# Altium PCB PCB_3U_RJ45.PCBDOC (part 2 of 2)
Units mil, origin at the board's own origin, x right, y up, seen from the top; angles counter-clockwise.
Board outline 2496.06 x 3937 mil, 4 copper layers (TopLayer, MidLayer2, Internal Plane 1, BottomLayer), stack 44.239 mil thick; 189 components, 140 nets, 780 pads, 257 vias.
Unrouted connection lines stored in the file: 406.
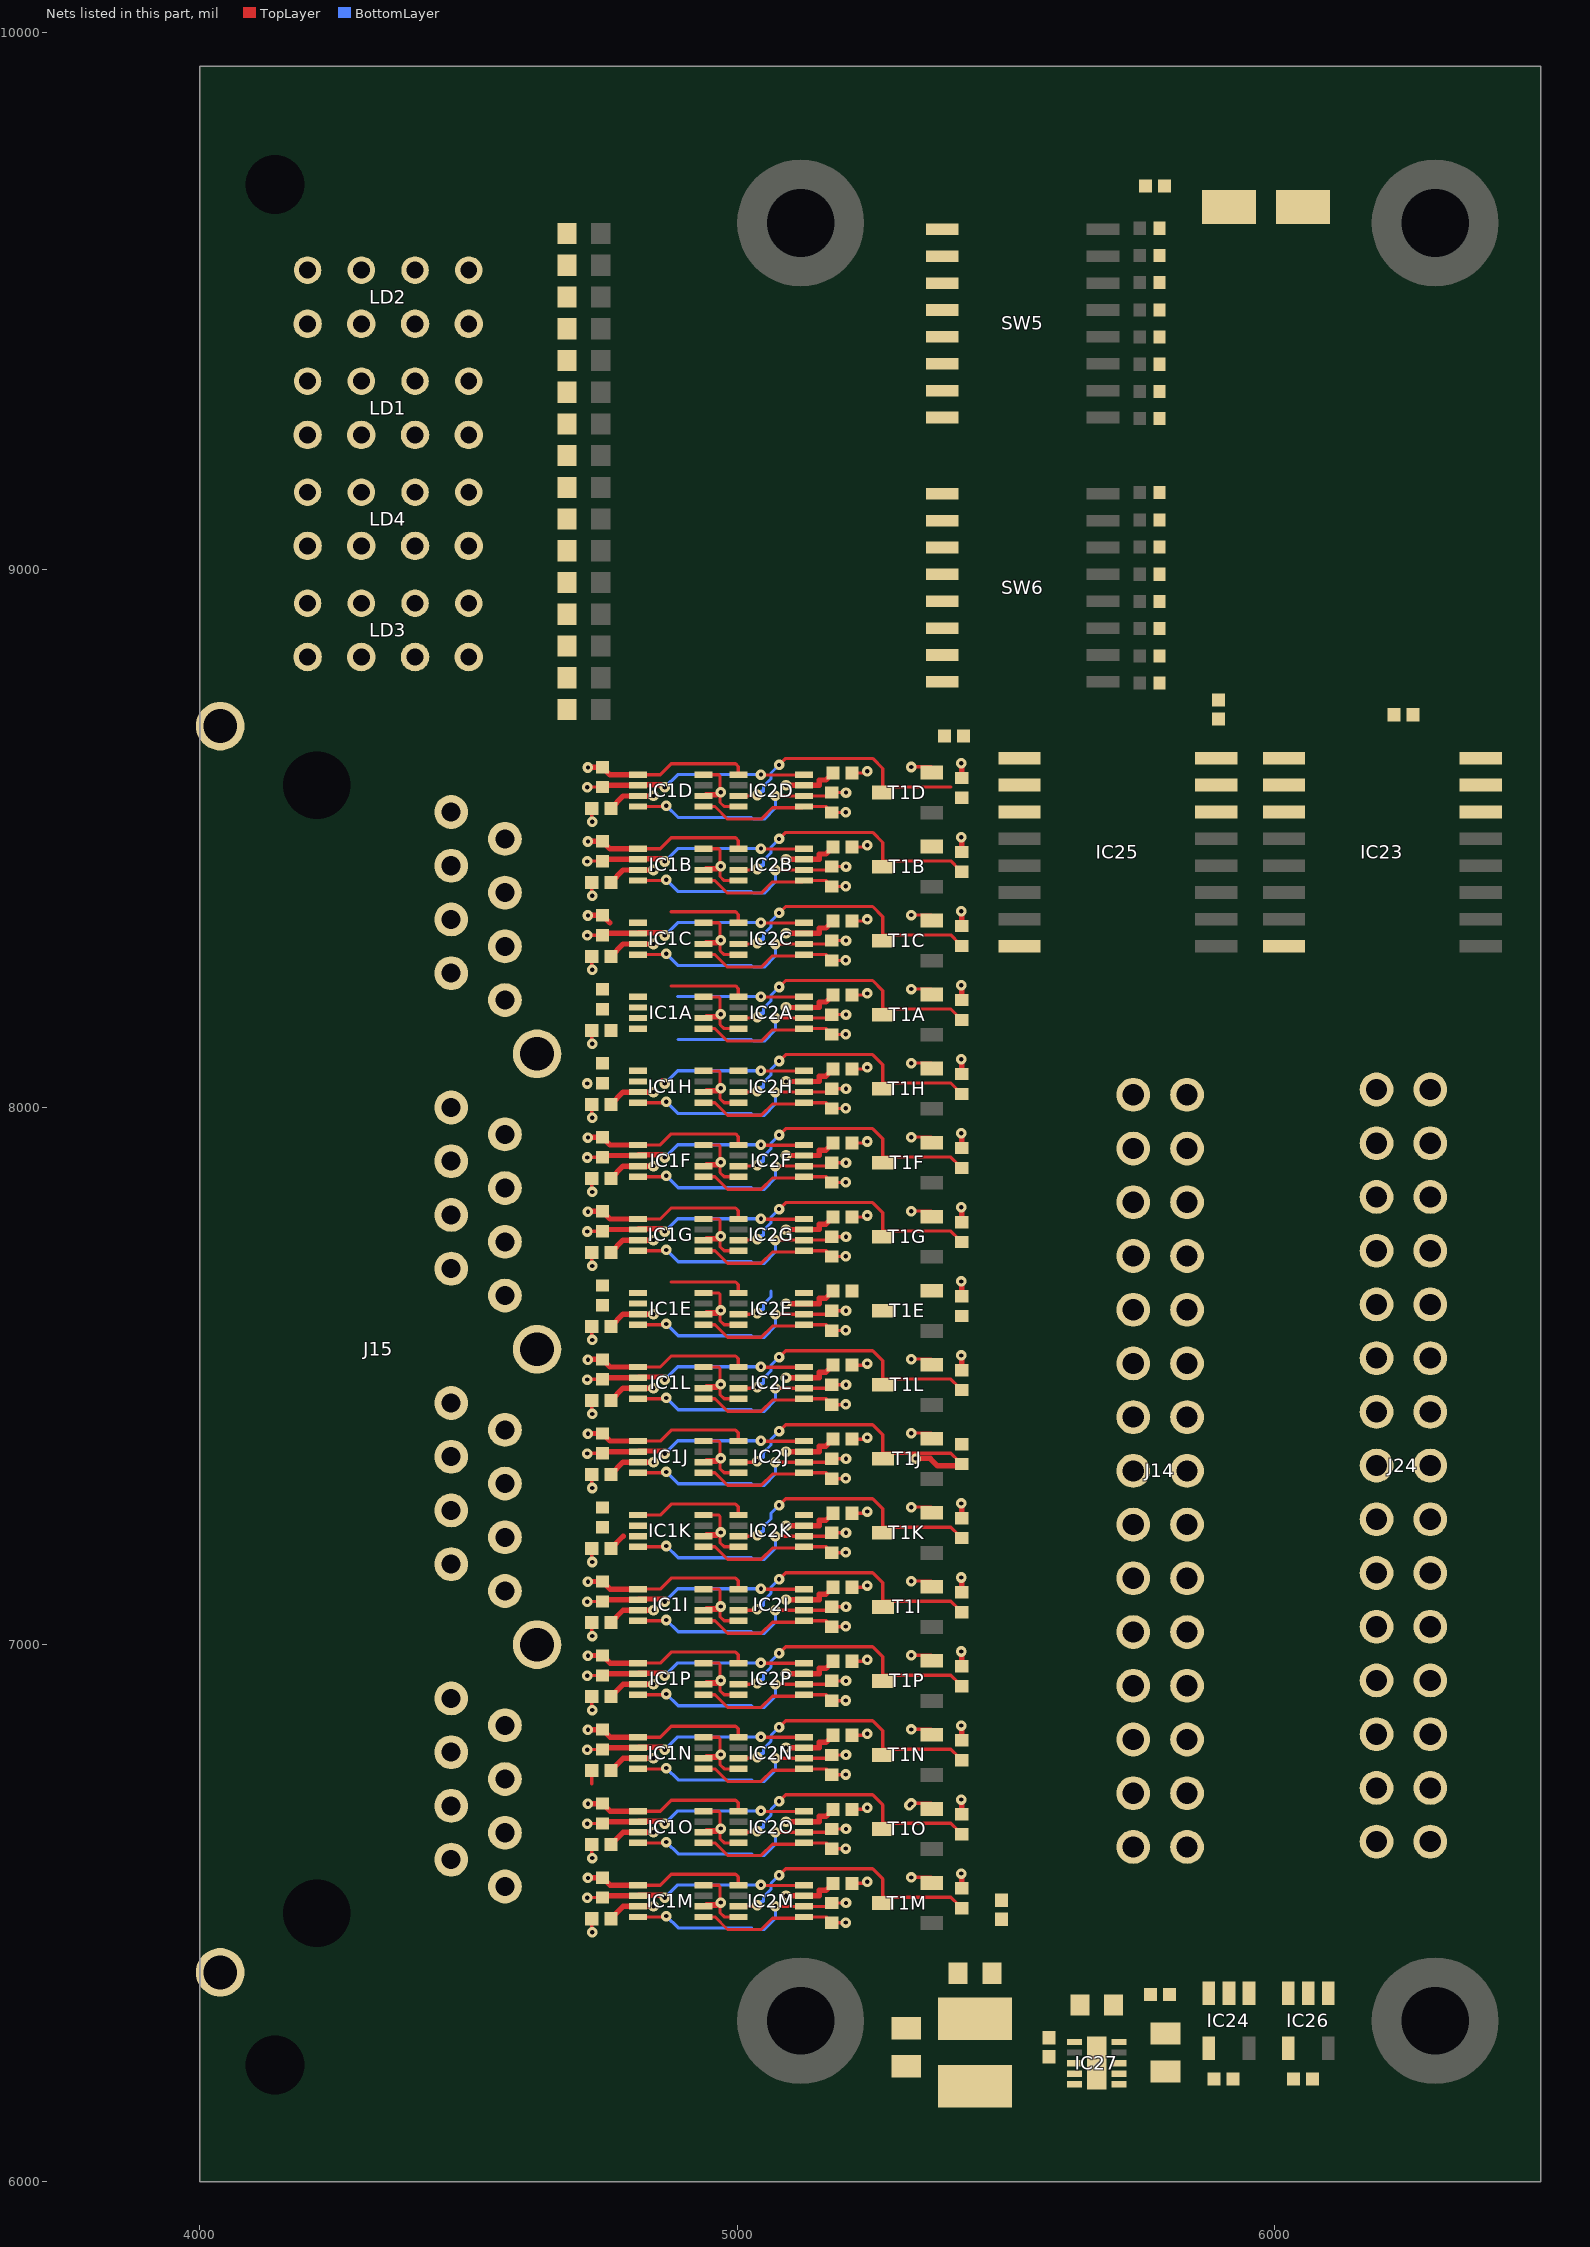
[diagram p3: the nets of this part, all layers, seen from the top]

## Via types
v1: diameter 19.68, hole 7.87, TopLayer to BottomLayer, 257 vias

## Nets (pads, with @x,y where several pads share a name; then routed paths per layer and width w, separated by ;. In a path a pad name is that pad's centre, name@x,y a point inside that pad or via, vN(x,y) a via of type N, cw(c..) or ccw(c..) an arc to the next point about the centre after c; other vN are vias at no path point) (continued)
GND: C1A.1 C1B.1 C1C.1 C1D.1 C1E.1 C1F.1 C1G.1 C1H.1 C1I.1 C1J.1 C1K.1 C1L.1 C1M.1 C1N.1 C1O.1 C1P.1 C2A.1 C2B.1 C2C.1 C2D.1 C2E.1 C2F.1 C2G.1 C2H.1 C2I.1 C2J.1 C2K.1 C2L.1 C2M.1 C2N.1 C2O.1 C2P.1 C57.1 C58.1 C59.1 C60.1 C61.1 C62.2 C63.1 C64.1 C65.1 C66.1 C67.1 C68.1 IC1A.2 IC1A.4 IC1B.2 IC1B.4 IC1C.2 IC1C.4 IC1D.2 IC1D.4 IC1E.2 IC1E.4 IC1F.2 IC1F.4 IC1G.2 IC1G.4 IC1H.2 IC1H.4 IC1I.2 IC1I.4 IC1J.2 IC1J.4 IC1K.2 IC1K.4 IC1L.2 IC1L.4 IC1M.2 IC1M.4 IC1N.2 IC1N.4 IC1O.2 IC1O.4 IC1P.2 IC1P.4 IC2A.4 IC2B.4 IC2C.4 IC2D.4 IC2E.4 IC2F.4 IC2G.4 IC2H.4 IC2I.4 IC2J.4 IC2K.4 IC2L.4 IC2M.4 IC2N.4 IC2O.4 IC2P.4 IC23.1 IC23.8 IC24.2 IC25.1 IC25.8 IC26.2 IC27.1 IC27.6 IC27.11 J14.1 J14.4 J14.7 J14.10 J14.13 J14.16 J14.19 J14.22 J14.25 J15.SH J24.1 J24.4 J24.7 J24.10 J24.13 J24.16 J24.19 J24.22 J24.25 R122.1 SW5.9 SW5.10 SW5.11 SW5.12 SW5.13 SW5.14 SW5.15 SW5.16 SW6.9 SW6.10 SW6.11 SW6.12 SW6.13 SW6.14 SW6.15 SW6.16 T1A.2 T1B.2 T1C.2 T1D.2 T1E.2 T1F.2 T1G.2 T1H.2 T1I.2 T1J.2 T1K.2 T1L.2 T1M.2 T1N.2 T1O.2 T1P.2 | length 4300.4
  TopLayer w6: C2M.1@4729.41,6489.2 4729.41,6464.91 v1(4730.13,6464.2) ; C2O.1@4729.41,6626.99 4729.41,6602.71 v1(4730.13,6601.99) ; 4729.41,6740.5 C2N.1@4729.41,6764.79 ; C2P.1@4729.41,6902.58 4729.41,6878.3 v1(4730.13,6877.58) ; C2I.1@4729.41,7040.38 4729.41,7016.09 v1(4730.13,7015.38) ; C2K.1@4729.41,7178.17 4729.41,7153.89 v1(4730.13,7153.17) ; C2J.1@4729.41,7315.97 4729.41,7291.69 v1(4730.13,7290.97) ; C2L.1@4729.41,7453.76 4729.41,7429.48 v1(4730.13,7428.76) ; C2E.1@4729.41,7591.56 4729.41,7567.28 v1(4730.13,7566.56) ; C2G.1@4729.41,7729.35 4729.41,7705.07 v1(4730.13,7704.35) ; C2F.1@4729.41,7867.15 4729.41,7842.87 v1(4730.13,7842.15) ; C2H.1@4729.41,8004.94 4729.41,7980.66 v1(4730.13,7979.94) ; C2A.1@4729.41,8142.74 4729.41,8118.46 v1(4730.13,8117.74) ; C2C.1@4729.41,8280.54 4729.41,8256.25 v1(4730.13,8255.54) ; C2B.1@4729.41,8418.33 4729.41,8394.05 v1(4730.13,8393.33) ; C2D.1@4729.41,8556.13 4729.41,8531.84 v1(4730.13,8531.13) ; IC1M.4@4937.15,6551.57 4965.6,6551.57 4968.13,6549.04 4968.13,6520.62 v1(4969.53,6519.22) v1@4968.13,6517.82 ; IC1O.4@4937.15,6689.36 4965.6,6689.36 4968.13,6686.83 4968.13,6658.41 v1(4969.53,6657.01) v1@4968.13,6655.61 ; IC1N.4@4937.15,6827.16 4965.6,6827.16 4968.13,6824.63 4968.13,6796.21 v1(4969.53,6794.81) v1@4968.13,6793.41 ; IC1P.4@4937.15,6964.95 4965.6,6964.95 4968.13,6962.43 4968.13,6934.01 v1(4969.53,6932.6) v1@4968.13,6931.2 ; IC1I.4@4937.15,7102.75 4965.6,7102.75 4968.13,7100.22 4968.13,7071.8 v1(4969.53,7070.4) v1@4968.13,7069 ; IC1K.4@4937.15,7240.54 4965.6,7240.54 4968.13,7238.02 4968.13,7209.6 v1(4969.53,7208.19) v1@4968.13,7206.79 ; IC1J.4@4937.15,7378.34 4965.6,7378.34 4968.13,7375.81 4968.13,7347.39 v1(4969.53,7345.99) v1@4968.13,7344.59 ; IC1L.4@4937.15,7516.13 4965.6,7516.13 4968.13,7513.61 4968.13,7485.19 v1(4969.53,7483.78) v1@4968.13,7482.38 ; IC1E.4@4937.15,7653.93 4965.6,7653.93 4968.13,7651.4 4968.13,7622.98 v1(4969.53,7621.58) v1@4968.13,7620.18 ; IC1G.4@4937.15,7791.72 4965.6,7791.72 4968.13,7789.2 4968.13,7760.78 v1(4969.53,7759.38) v1@4968.13,7757.97 ; IC1F.4@4937.15,7929.52 4965.6,7929.52 4968.13,7926.99 4968.13,7898.57 v1(4969.53,7897.17) v1@4968.13,7895.77 ; IC1H.4@4937.15,8067.31 4965.6,8067.31 4968.13,8064.79 4968.13,8036.37 v1(4969.53,8034.97) v1@4968.13,8033.56 ; IC1A.2@4937.15,8165.74 4962.51,8165.74 v1@4967.29,8170.52 ; IC1A.4@4937.15,8205.11 4965.6,8205.11 4968.13,8202.58 4968.13,8174.16 v1(4969.53,8172.76) v1@4968.13,8171.36 ; IC1C.4@4937.15,8342.91 4965.6,8342.91 4968.13,8340.38 4968.13,8311.96 v1(4969.53,8310.56) v1@4968.13,8309.15 ; IC1B.4@4937.15,8480.7 4965.6,8480.7 4968.13,8478.17 4968.13,8449.75 v1(4969.53,8448.35) v1@4968.13,8446.95 ; IC1D.4@4937.15,8618.5 4965.6,8618.5 4968.13,8615.97 4968.13,8587.55 v1(4969.53,8586.15) v1@4968.13,8584.75 ; IC1A.2@4941.93,8170.52 v1@4967.29,8170.52 ; IC2M.4@5002.1,6492.51 4975.65,6492.51 4968.13,6500.04 v1@4968.13,6517.82 ; IC2O.4@5002.1,6630.31 4975.65,6630.31 4968.13,6637.83 v1@4968.13,6655.61 ; IC2N.4@5002.1,6768.1 4975.65,6768.1 4968.13,6775.63 v1@4968.13,6793.41 ; IC2P.4@5002.1,6905.9 4975.65,6905.9 4968.13,6913.43 v1@4968.13,6931.2 ; IC2I.4@5002.1,7043.69 4975.65,7043.69 4968.13,7051.22 v1@4968.13,7069 ; IC2K.4@5002.1,7181.49 4975.65,7181.49 4968.13,7189.02 v1@4968.13,7206.79 ; IC2J.4@5002.1,7319.28 4975.65,7319.28 4968.13,7326.81 v1@4968.13,7344.59 ; IC2L.4@5002.1,7457.08 4975.65,7457.08 4968.13,7464.61 v1@4968.13,7482.38 ; IC2E.4@5002.1,7594.87 4975.65,7594.87 4968.13,7602.4 v1@4968.13,7620.18 ; IC2G.4@5002.1,7732.67 4975.65,7732.67 4968.13,7740.2 v1@4968.13,7757.97 ; IC2F.4@5002.1,7870.46 4975.65,7870.46 4968.13,7877.99 v1@4968.13,7895.77 ; IC2H.4@5002.1,8008.26 4975.65,8008.26 4968.13,8015.79 v1@4968.13,8033.56 ; IC2A.4@5002.1,8146.06 4975.65,8146.06 4968.13,8153.58 v1@4968.13,8171.36 ; IC2C.4@5002.1,8283.85 4975.65,8283.85 4968.13,8291.38 v1@4968.13,8309.15 ; IC2B.4@5002.1,8421.65 4975.65,8421.65 4968.13,8429.17 v1@4968.13,8446.95 ; IC2D.4@5002.1,8559.44 4975.65,8559.44 4968.13,8566.97 v1@4968.13,8584.75 ; C1M.1@5213.84,6555.04 5241.13,6555.04 5242.13,6556.04 v1(5242.13,6558.04) ; C1O.1@5213.84,6692.83 5241.13,6692.83 5242.13,6693.83 v1(5242.13,6695.83) ; C1N.1@5213.84,6830.63 5241.13,6830.63 5242.13,6831.63 v1(5242.13,6833.63) ; C1P.1@5213.84,6968.43 5241.13,6968.43 5242.13,6969.43 v1(5242.13,6971.43) ; C1I.1@5213.84,7106.22 5241.13,7106.22 5242.13,7107.22 v1(5242.13,7109.22) ; C1K.1@5213.84,7244.02 5241.13,7244.02 5242.13,7245.02 v1(5242.13,7247.02) ; C1J.1@5213.84,7381.81 5241.13,7381.81 5242.13,7382.81 v1(5242.13,7384.81) ; C1L.1@5213.84,7519.61 5241.13,7519.61 5242.13,7520.61 v1(5242.13,7522.61) ; C1G.1@5213.84,7795.2 5241.13,7795.2 5242.13,7796.2 v1(5242.13,7798.2) ; C1F.1@5213.84,7932.99 5241.13,7932.99 5242.13,7933.99 v1(5242.13,7935.99) ; C1H.1@5213.84,8070.79 5241.13,8070.79 5242.13,8071.79 v1(5242.13,8073.79) ; C1A.1@5213.84,8208.58 5241.13,8208.58 5242.13,8209.58 v1(5242.13,8211.58) ; C1C.1@5213.84,8346.38 5241.13,8346.38 5242.13,8347.38 v1(5242.13,8349.38) ; C1B.1@5213.84,8484.17 5241.13,8484.17 5242.13,8485.17 v1(5242.13,8487.17) ; C1D.1@5213.84,8621.97 5241.13,8621.97 5242.13,8622.97 v1(5242.13,8624.97) ; v1@5319.96,6701.13 v1(5320.68,6700.42) ; v1(5324.13,6566.04) 5324.53,6566.44 T1M.2@5361.4,6566.44 ; v1(5324.13,6703.83) 5324.53,6704.24 T1O.2@5361.4,6704.24 ; v1(5324.13,6841.63) 5324.53,6842.03 T1N.2@5361.4,6842.03 ; v1(5324.13,6979.43) 5324.53,6979.83 T1P.2@5361.4,6979.83 ; v1(5324.13,7117.22) 5324.53,7117.62 T1I.2@5361.4,7117.62 ; v1(5324.13,7255.02) 5324.53,7255.42 T1K.2@5361.4,7255.42 ; v1(5324.13,7530.61) 5324.53,7531.01 T1L.2@5361.4,7531.01 ; v1(5324.13,7806.2) 5324.53,7806.6 T1G.2@5361.4,7806.6 ; v1(5324.13,7943.99) 5324.53,7944.39 T1F.2@5361.4,7944.39 ; v1(5324.13,8081.79) 5324.53,8082.19 T1H.2@5361.4,8082.19 ; v1(5324.13,8219.58) 5324.53,8219.98 T1A.2@5361.4,8219.98 ; v1(5324.13,8357.38) 5324.53,8357.78 T1C.2@5361.4,8357.78 ; v1(5324.13,8632.97) 5324.53,8633.37 T1D.2@5361.4,8633.37 ; v1@4967.29,6516.98 4962.51,6512.2 IC1M.2@4937.15,6512.2 4941.93,6516.98 v1@4967.29,6516.98 ; v1@4967.29,6516.98 v1@4968.13,6517.82 ; v1@4967.29,6654.77 v1@4968.13,6655.61 ; v1@4967.29,6654.77 4941.93,6654.77 IC1O.2@4937.15,6649.99 4962.51,6649.99 v1@4967.29,6654.77 ; v1@4967.29,6792.57 v1@4968.13,6793.41 ; v1@4967.29,6792.57 4941.93,6792.57 IC1N.2@4937.15,6787.79 4962.51,6787.79 v1@4967.29,6792.57 ; v1@4967.29,6930.36 v1@4968.13,6931.2 ; v1@4967.29,6930.36 4941.93,6930.36 IC1P.2@4937.15,6925.58 4962.51,6925.58 v1@4967.29,6930.36 ; v1@4967.29,7068.16 v1@4968.13,7069 ; v1@4967.29,7068.16 4941.93,7068.16 IC1I.2@4937.15,7063.38 4962.51,7063.38 v1@4967.29,7068.16 ; v1@4967.29,7205.95 v1@4968.13,7206.79 ; v1@4967.29,7205.95 4941.93,7205.95 IC1K.2@4937.15,7201.17 4962.51,7201.17 v1@4967.29,7205.95 ; v1@4967.29,7343.75 v1@4968.13,7344.59 ; v1@4967.29,7343.75 4941.93,7343.75 IC1J.2@4937.15,7338.97 4962.51,7338.97 v1@4967.29,7343.75 ; v1@4967.29,7481.54 v1@4968.13,7482.38 ; v1@4967.29,7481.54 4941.93,7481.54 IC1L.2@4937.15,7476.76 4962.51,7476.76 v1@4967.29,7481.54 ; v1@4967.29,7619.34 v1@4968.13,7620.18 ; v1@4967.29,7619.34 4941.93,7619.34 IC1E.2@4937.15,7614.56 4962.51,7614.56 v1@4967.29,7619.34 ; v1@4967.29,7757.13 v1@4968.13,7757.97 ; v1@4967.29,7757.13 4941.93,7757.13 IC1G.2@4937.15,7752.35 4962.51,7752.35 v1@4967.29,7757.13 ; v1@4967.29,7894.93 v1@4968.13,7895.77 ; v1@4967.29,7894.93 4941.93,7894.93 IC1F.2@4937.15,7890.15 4962.51,7890.15 v1@4967.29,7894.93 ; v1@4967.29,8032.72 v1@4968.13,8033.56 ; v1@4967.29,8032.72 4941.93,8032.72 IC1H.2@4937.15,8027.94 4962.51,8027.94 v1@4967.29,8032.72 ; v1@4967.29,8170.52 v1@4968.13,8171.36 ; v1@4967.29,8308.32 v1@4968.13,8309.15 ; v1@4967.29,8308.32 4941.93,8308.32 IC1C.2@4937.15,8303.54 4962.51,8303.54 v1@4967.29,8308.32 ; v1@4967.29,8446.11 v1@4968.13,8446.95 ; v1@4967.29,8446.11 4941.93,8446.11 IC1B.2@4937.15,8441.33 4962.51,8441.33 v1@4967.29,8446.11 ; v1@4967.29,8583.91 v1@4968.13,8584.75 ; v1@4967.29,8583.91 4941.93,8583.91 IC1D.2@4937.15,8579.13 4962.51,8579.13 v1@4967.29,8583.91
I2C1_SCL: IC23.14 IC24.1 J14.27
I2C1_SDA: IC23.15 IC24.3 J14.26
I2C2_SCL: IC25.14 IC26.1 J24.27
I2C2_SDA: IC25.15 IC26.3 J24.26
LVDS1_N: IC1P.1 IC2P.5 J14.3 R2P.2 | length 288.6
  TopLayer w6: IC1P.1@4937.15,6905.9 4958.68,6905.9 4982,6882.58 5044.93,6882.58 5065.77,6903.43 5121.68,6903.43 IC2P.5@5124.15,6905.9 5166.15,6905.9 R2P.2@5176.13,6895.92 ; R2P.2@5176.13,6894.92 5201.62,6894.92 v1(5202.13,6895.43)
LVDS1_P: IC1P.8 IC2P.6 J14.2 R2P.1 | length 430
  TopLayer w6: IC1P.8@4815.1,6905.9 v1@4866.6,6905.9 ; v1(5071.28,6925.58) IC2P.6@5124.15,6925.58 5168.78,6925.58 R2P.1@5176.13,6932.93 ; R2P.1@5176.13,6931.93 v1(5202.63,6931.93)
  BottomLayer w6: v1(4868.13,6907.43) 4890.13,6885.43 5026.48,6885.43 5029.32,6882.58 5050.28,6882.58 5071.28,6903.58 v1(5071.28,6925.58)
LVDS2_N: IC1O.1 IC2O.5 J14.6 R2O.2 | length 288.6
  TopLayer w6: IC1O.1@4937.15,6630.31 4958.68,6630.31 4982,6606.99 5044.93,6606.99 5065.77,6627.83 5121.68,6627.83 IC2O.5@5124.15,6630.31 5166.15,6630.31 R2O.2@5176.13,6620.33 ; R2O.2@5176.13,6619.33 5201.62,6619.33 v1(5202.13,6619.83)
LVDS2_P: IC1O.8 IC2O.6 J14.5 R2O.1 | length 430
  TopLayer w6: IC1O.8@4815.1,6630.31 v1@4866.6,6630.31 ; v1(5071.28,6649.99) IC2O.6@5124.15,6649.99 5168.78,6649.99 R2O.1@5176.13,6657.34 ; R2O.1@5176.13,6656.34 v1(5202.63,6656.34)
  BottomLayer w6: v1(4868.13,6631.83) 4890.13,6609.83 5026.48,6609.83 5029.32,6606.99 5050.28,6606.99 5071.28,6627.99 v1(5071.28,6649.99)
LVDS3_N: IC1N.1 IC2N.5 J14.9 R2N.2 | length 288.6
  TopLayer w6: IC1N.1@4937.15,6768.1 4958.68,6768.1 4982,6744.79 5044.93,6744.79 5065.77,6765.63 5121.68,6765.63 IC2N.5@5124.15,6768.1 5166.15,6768.1 R2N.2@5176.13,6758.13 ; R2N.2@5176.13,6757.13 5201.62,6757.13 v1(5202.13,6757.63)
LVDS3_P: IC1N.8 IC2N.6 J14.8 R2N.1 | length 430
  TopLayer w6: IC1N.8@4815.1,6768.1 v1@4866.6,6768.1 ; v1(5071.28,6787.79) IC2N.6@5124.15,6787.79 5168.78,6787.79 R2N.1@5176.13,6795.13 ; R2N.1@5176.13,6794.13 v1(5202.63,6794.13)
  BottomLayer w6: v1(4868.13,6769.63) 4890.13,6747.63 5026.48,6747.63 5029.32,6744.79 5050.28,6744.79 5071.28,6765.79 v1(5071.28,6787.79)
LVDS4_N: IC1M.1 IC2M.5 J14.12 R2M.2 | length 288.6
  TopLayer w6: IC1M.1@4937.15,6492.51 4958.68,6492.51 4982,6469.2 5044.93,6469.2 5065.77,6490.04 5121.68,6490.04 IC2M.5@5124.15,6492.51 5166.15,6492.51 R2M.2@5176.13,6482.54 ; R2M.2@5176.13,6481.54 5201.62,6481.54 v1(5202.13,6482.04)
LVDS4_P: IC1M.8 IC2M.6 J14.11 R2M.1 | length 430
  TopLayer w6: IC1M.8@4815.1,6492.51 v1@4866.6,6492.51 ; v1(5071.28,6512.2) IC2M.6@5124.15,6512.2 5168.78,6512.2 R2M.1@5176.13,6519.54 ; R2M.1@5176.13,6518.54 v1(5202.63,6518.54)
  BottomLayer w6: v1(4868.13,6494.04) 4890.13,6472.04 5026.48,6472.04 5029.32,6469.2 5050.28,6469.2 5071.28,6490.2 v1(5071.28,6512.2)
LVDS5_N: IC1L.1 IC2L.5 J14.15 R2L.2 | length 288.6
  TopLayer w6: IC1L.1@4937.15,7457.08 4958.68,7457.08 4982,7433.76 5044.93,7433.76 5065.77,7454.61 5121.68,7454.61 IC2L.5@5124.15,7457.08 5166.15,7457.08 R2L.2@5176.13,7447.1 ; R2L.2@5176.13,7446.1 5201.62,7446.1 v1(5202.13,7446.61)
LVDS5_P: IC1L.8 IC2L.6 J14.14 R2L.1 | length 430
  TopLayer w6: IC1L.8@4815.1,7457.08 v1@4866.6,7457.08 ; v1(5071.28,7476.76) IC2L.6@5124.15,7476.76 5168.78,7476.76 R2L.1@5176.13,7484.11 ; R2L.1@5176.13,7483.11 v1(5202.63,7483.11)
  BottomLayer w6: v1(4868.13,7458.61) 4890.13,7436.61 5026.48,7436.61 5029.32,7433.76 5050.28,7433.76 5071.28,7454.76 v1(5071.28,7476.76)
LVDS6_N: IC1K.1 IC2K.5 J14.18 R2K.2 | length 288.6
  TopLayer w6: IC1K.1@4937.15,7181.49 4958.68,7181.49 4982,7158.17 5044.93,7158.17 5065.77,7179.02 5121.68,7179.02 IC2K.5@5124.15,7181.49 5166.15,7181.49 R2K.2@5176.13,7171.51 ; R2K.2@5176.13,7170.51 5201.62,7170.51 v1(5202.13,7171.02)
LVDS6_P: IC1K.8 IC2K.6 J14.17 R2K.1 | length 430
  TopLayer w6: IC1K.8@4815.1,7181.49 v1@4866.6,7181.49 ; v1(5071.28,7201.17) IC2K.6@5124.15,7201.17 5168.78,7201.17 R2K.1@5176.13,7208.52 ; R2K.1@5176.13,7207.52 v1(5202.63,7207.52)
  BottomLayer w6: v1(4868.13,7183.02) 4890.13,7161.02 5026.48,7161.02 5029.32,7158.17 5050.28,7158.17 5071.28,7179.17 v1(5071.28,7201.17)
LVDS7_N: IC1J.1 IC2J.5 J14.21 R2J.2 | length 288.6
  TopLayer w6: IC1J.1@4937.15,7319.28 4958.68,7319.28 4982,7295.97 5044.93,7295.97 5065.77,7316.81 5121.68,7316.81 IC2J.5@5124.15,7319.28 5166.15,7319.28 R2J.2@5176.13,7309.31 ; R2J.2@5176.13,7308.31 5201.62,7308.31 v1(5202.13,7308.81)
LVDS7_P: IC1J.8 IC2J.6 J14.20 R2J.1 | length 430
  TopLayer w6: IC1J.8@4815.1,7319.28 v1@4866.6,7319.28 ; v1(5071.28,7338.97) IC2J.6@5124.15,7338.97 5168.78,7338.97 R2J.1@5176.13,7346.31 ; R2J.1@5176.13,7345.31 v1(5202.63,7345.31)
  BottomLayer w6: v1(4868.13,7320.81) 4890.13,7298.81 5026.48,7298.81 5029.32,7295.97 5050.28,7295.97 5071.28,7316.97 v1(5071.28,7338.97)
LVDS8_N: IC1I.1 IC2I.5 J14.24 R2I.2 | length 288.6
  TopLayer w6: IC1I.1@4937.15,7043.69 4958.68,7043.69 4982,7020.38 5044.93,7020.38 5065.77,7041.22 5121.68,7041.22 IC2I.5@5124.15,7043.69 5166.15,7043.69 R2I.2@5176.13,7033.72 ; R2I.2@5176.13,7032.72 5201.62,7032.72 v1(5202.13,7033.22)
LVDS8_P: IC1I.8 IC2I.6 J14.23 R2I.1 | length 430
  TopLayer w6: IC1I.8@4815.1,7043.69 v1@4866.6,7043.69 ; v1(5071.28,7063.38) IC2I.6@5124.15,7063.38 5168.78,7063.38 R2I.1@5176.13,7070.72 ; R2I.1@5176.13,7069.72 v1(5202.63,7069.72)
  BottomLayer w6: v1(4868.13,7045.22) 4890.13,7023.22 5026.48,7023.22 5029.32,7020.38 5050.28,7020.38 5071.28,7041.38 v1(5071.28,7063.38)
LVDS9_N: IC1H.1 IC2H.5 J24.3 R2H.2 | length 288.6
  TopLayer w6: IC1H.1@4937.15,8008.26 4958.68,8008.26 4982,7984.94 5044.93,7984.94 5065.77,8005.79 5121.68,8005.79 IC2H.5@5124.15,8008.26 5166.15,8008.26 R2H.2@5176.13,7998.28 ; R2H.2@5176.13,7997.28 5201.62,7997.28 v1(5202.13,7997.79)
LVDS9_P: IC1H.8 IC2H.6 J24.2 R2H.1 | length 430
  TopLayer w6: IC1H.8@4815.1,8008.26 v1@4866.6,8008.26 ; v1(5071.28,8027.94) IC2H.6@5124.15,8027.94 5168.78,8027.94 R2H.1@5176.13,8035.29 ; R2H.1@5176.13,8034.29 v1(5202.63,8034.29)
  BottomLayer w6: v1(4868.13,8009.79) 4890.13,7987.79 5026.48,7987.79 5029.32,7984.94 5050.28,7984.94 5071.28,8005.94 v1(5071.28,8027.94)
LVDS10_N: IC1G.1 IC2G.5 J24.6 R2G.2 | length 288.6
  TopLayer w6: IC1G.1@4937.15,7732.67 4958.68,7732.67 4982,7709.35 5044.93,7709.35 5065.77,7730.2 5121.68,7730.2 IC2G.5@5124.15,7732.67 5166.15,7732.67 R2G.2@5176.13,7722.69 ; R2G.2@5176.13,7721.69 5201.62,7721.69 v1(5202.13,7722.2)
LVDS10_P: IC1G.8 IC2G.6 J24.5 R2G.1 | length 430
  TopLayer w6: IC1G.8@4815.1,7732.67 v1@4866.6,7732.67 ; v1(5071.28,7752.35) IC2G.6@5124.15,7752.35 5168.78,7752.35 R2G.1@5176.13,7759.7 ; R2G.1@5176.13,7758.7 v1(5202.63,7758.7)
  BottomLayer w6: v1(4868.13,7734.2) 4890.13,7712.2 5026.48,7712.2 5029.32,7709.35 5050.28,7709.35 5071.28,7730.35 v1(5071.28,7752.35)
LVDS11_N: IC1F.1 IC2F.5 J24.9 R2F.2 | length 288.6
  TopLayer w6: IC1F.1@4937.15,7870.46 4958.68,7870.46 4982,7847.15 5044.93,7847.15 5065.77,7867.99 5121.68,7867.99 IC2F.5@5124.15,7870.46 5166.15,7870.46 R2F.2@5176.13,7860.49 ; R2F.2@5176.13,7859.49 5201.62,7859.49 v1(5202.13,7859.99)
LVDS11_P: IC1F.8 IC2F.6 J24.8 R2F.1 | length 430
  TopLayer w6: IC1F.8@4815.1,7870.46 v1@4866.6,7870.46 ; v1(5071.28,7890.15) IC2F.6@5124.15,7890.15 5168.78,7890.15 R2F.1@5176.13,7897.5 ; R2F.1@5176.13,7896.5 v1(5202.63,7896.5)
  BottomLayer w6: v1(4868.13,7871.99) 4890.13,7849.99 5026.48,7849.99 5029.32,7847.15 5050.28,7847.15 5071.28,7868.15 v1(5071.28,7890.15)
LVDS12_N: IC1E.1 IC2E.5 J24.12 R2E.2 | length 287.9
  TopLayer w6: IC1E.1@4937.15,7594.87 4958.68,7594.87 4982,7571.56 5044.93,7571.56 5065.77,7592.4 5121.68,7592.4 IC2E.5@5124.15,7594.87 5166.15,7594.87 R2E.2@5176.13,7584.9 ; R2E.2@5176.13,7583.9 v1@5201.62,7583.9
  other v1: 5202.13,7584.4
LVDS12_P: IC1E.8 IC2E.6 J24.11 R2E.1 | length 430
  TopLayer w6: IC1E.8@4815.1,7594.87 v1@4866.6,7594.87 ; v1(5071.28,7614.56) IC2E.6@5124.15,7614.56 5168.78,7614.56 R2E.1@5176.13,7621.91 ; R2E.1@5176.13,7620.91 v1(5202.63,7620.91)
  BottomLayer w6: v1(4868.13,7596.4) 4890.13,7574.4 5026.48,7574.4 5029.32,7571.56 5050.28,7571.56 5071.28,7592.56 v1(5071.28,7614.56)
LVDS13_N: IC1D.1 IC2D.5 J24.15 R2D.2 | length 288.6
  TopLayer w6: IC1D.1@4937.15,8559.44 4958.68,8559.44 4982,8536.13 5044.93,8536.13 5065.77,8556.97 5121.68,8556.97 IC2D.5@5124.15,8559.44 5166.15,8559.44 R2D.2@5176.13,8549.46 ; R2D.2@5176.13,8548.46 5201.62,8548.46 v1(5202.13,8548.97)
LVDS13_P: IC1D.8 IC2D.6 J24.14 R2D.1 | length 430
  TopLayer w6: IC1D.8@4815.1,8559.44 v1@4866.6,8559.44 ; v1(5071.28,8579.13) IC2D.6@5124.15,8579.13 5168.78,8579.13 R2D.1@5176.13,8586.47 ; R2D.1@5176.13,8585.47 v1(5202.63,8585.47)
  BottomLayer w6: v1(4868.13,8560.97) 4890.13,8538.97 5026.48,8538.97 5029.32,8536.13 5050.28,8536.13 5071.28,8557.13 v1(5071.28,8579.13)
LVDS14_N: IC1C.1 IC2C.5 J24.18 R2C.2 | length 288.6
  TopLayer w6: IC1C.1@4937.15,8283.85 4958.68,8283.85 4982,8260.54 5044.93,8260.54 5065.77,8281.38 5121.68,8281.38 IC2C.5@5124.15,8283.85 5166.15,8283.85 R2C.2@5176.13,8273.87 ; R2C.2@5176.13,8272.87 5201.62,8272.87 v1(5202.13,8273.38)
LVDS14_P: IC1C.8 IC2C.6 J24.17 R2C.1 | length 430
  TopLayer w6: IC1C.8@4815.1,8283.85 v1@4866.6,8283.85 ; v1(5071.28,8303.54) IC2C.6@5124.15,8303.54 5168.78,8303.54 R2C.1@5176.13,8310.88 ; R2C.1@5176.13,8309.88 v1(5202.63,8309.88)
  BottomLayer w6: v1(4868.13,8285.38) 4890.13,8263.38 5026.48,8263.38 5029.32,8260.54 5050.28,8260.54 5071.28,8281.54 v1(5071.28,8303.54)
LVDS15_N: IC1B.1 IC2B.5 J24.21 R2B.2 | length 288.6
  TopLayer w6: IC1B.1@4937.15,8421.65 4958.68,8421.65 4982,8398.33 5044.93,8398.33 5065.77,8419.17 5121.68,8419.17 IC2B.5@5124.15,8421.65 5166.15,8421.65 R2B.2@5176.13,8411.67 ; R2B.2@5176.13,8410.67 5201.62,8410.67 v1(5202.13,8411.17)
LVDS15_P: IC1B.8 IC2B.6 J24.20 R2B.1 | length 430
  TopLayer w6: IC1B.8@4815.1,8421.65 v1@4866.6,8421.65 ; v1(5071.28,8441.33) IC2B.6@5124.15,8441.33 5168.78,8441.33 R2B.1@5176.13,8448.68 ; R2B.1@5176.13,8447.68 v1(5202.63,8447.68)
  BottomLayer w6: v1(4868.13,8423.17) 4890.13,8401.17 5026.48,8401.17 5029.32,8398.33 5050.28,8398.33 5071.28,8419.33 v1(5071.28,8441.33)
LVDS16_N: IC1A.1 IC2A.5 J24.24 R2A.2 | length 288.6
  TopLayer w6: IC1A.1@4937.15,8146.06 4958.68,8146.06 4982,8122.74 5044.93,8122.74 5065.77,8143.58 5121.68,8143.58 IC2A.5@5124.15,8146.06 5166.15,8146.06 R2A.2@5176.13,8136.08 ; R2A.2@5176.13,8135.08 5201.62,8135.08 v1(5202.13,8135.58)
LVDS16_P: IC1A.8 IC2A.6 J24.23 R2A.1 | length 347.4
  TopLayer w6: v1(5071.28,8165.74) IC2A.6@5124.15,8165.74 5168.78,8165.74 R2A.1@5176.13,8173.09 ; R2A.1@5176.13,8172.09 v1(5202.63,8172.09)
  BottomLayer w6: 4890.13,8125.58 5026.48,8125.58 5029.32,8122.74 5050.28,8122.74 5071.28,8143.74 v1(5071.28,8165.74)
NetIC1A_5: IC1A.5 IC2A.1 J15.8D R1A.1 | length 170.4
  TopLayer w6: 4877.13,8225.58 4997.13,8225.58 5002.1,8220.61 IC2A.1@5002.1,8205.11
  TopLayer w10: v1(5417.13,7675.56) 5418.13,7674.56 5418.13,7648.06
NetIC1A_6: IC1A.6 IC2A.8 J15.7D R1A.2 | length 235.5
  TopLayer w6: v1(5044.13,8205.58) 5044.97,8204.74 5123.78,8204.74 IC2A.8@5124.15,8205.11
  BottomLayer w6: 4889.13,8205.58 v1(5044.13,8205.58)
NetIC1B_5: IC1B.5 IC2B.1 J15.6D R1B.1 | length 312.1
  TopLayer w6: IC1B.5@4815.1,8480.7 4856.65,8480.7 4877.13,8501.17 4997.13,8501.17 5002.1,8496.2 IC2B.1@5002.1,8480.7
  TopLayer w10: v1(4722.13,8494.33) 4722.63,8494.83 R1B.1@4749.13,8494.83 4763.26,8480.7 IC1B.5@4815.1,8480.7
NetIC1B_6: IC1B.6 IC2B.8 J15.3D R1B.2 | length 409.6
  TopLayer w6: v1(4721.13,8457.33) 4721.62,8457.83 R1B.2@4749.13,8457.83 ; v1(5044.13,8481.17) 5044.97,8480.33 5123.78,8480.33 IC2B.8@5124.15,8480.7
  TopLayer w10: R1B.2@4755.78,8461.02 IC1B.6@4815.1,8461.02 4816.26,8462.17 4860.13,8462.17 v1(4865.13,8457.17)
  BottomLayer w6: v1(4865.13,8457.17) 4889.13,8481.17 v1(5044.13,8481.17)
NetIC1C_5: IC1C.5 IC2C.1 J15.4D R1C.1 | length 189.7
  TopLayer w6: 4877.13,8363.38 4997.13,8363.38 5002.1,8358.4 IC2C.1@5002.1,8342.91
  TopLayer w10: v1(4722.13,8356.54) 4722.63,8357.04 R1C.1@4749.13,8357.04 4763.26,8342.91
NetIC1C_6: IC1C.6 IC2C.8 J15.5D R1C.2 | length 409.6
  TopLayer w6: v1(4721.13,8319.54) 4721.62,8320.03 R1C.2@4749.13,8320.03 ; v1(5044.13,8343.38) 5044.97,8342.54 5123.78,8342.54 IC2C.8@5124.15,8342.91
  TopLayer w10: R1C.2@4755.78,8323.22 IC1C.6@4815.1,8323.22 4816.26,8324.38 4860.13,8324.38 v1(4865.13,8319.38)
  BottomLayer w6: v1(4865.13,8319.38) 4889.13,8343.38 v1(5044.13,8343.38)
NetIC1D_5: IC1D.5 IC2D.1 J15.2D R1D.1 | length 312.1
  TopLayer w6: IC1D.5@4815.1,8618.5 4856.65,8618.5 4877.13,8638.97 4997.13,8638.97 5002.1,8633.99 IC2D.1@5002.1,8618.5
  TopLayer w10: v1(4722.13,8632.13) 4722.63,8632.63 R1D.1@4749.13,8632.63 4763.26,8618.5 IC1D.5@4815.1,8618.5
NetIC1D_6: IC1D.6 IC2D.8 J15.1D R1D.2 | length 409.6
  TopLayer w6: v1(4721.13,8595.13) 4721.62,8595.62 R1D.2@4749.13,8595.62 ; v1(5044.13,8618.97) 5044.97,8618.13 5123.78,8618.13 IC2D.8@5124.15,8618.5
  TopLayer w10: R1D.2@4755.78,8598.81 IC1D.6@4815.1,8598.81 4816.26,8599.97 4860.13,8599.97 v1(4865.13,8594.97)
  BottomLayer w6: v1(4865.13,8594.97) 4889.13,8618.97 v1(5044.13,8618.97)
NetIC1E_5: IC1E.5 IC2E.1 J15.8C R1E.1
NetIC1E_6: IC1E.6 IC2E.8 J15.7C R1E.2
NetIC1F_5: IC1F.5 IC2F.1 J15.6C R1F.1 | length 312.1
  TopLayer w6: IC1F.5@4815.1,7929.52 4856.65,7929.52 4877.13,7949.99 4997.13,7949.99 5002.1,7945.02 IC2F.1@5002.1,7929.52
  TopLayer w10: v1(4722.13,7943.15) 4722.63,7943.65 R1F.1@4749.13,7943.65 4763.26,7929.52 IC1F.5@4815.1,7929.52
NetIC1F_6: IC1F.6 IC2F.8 J15.3C R1F.2 | length 409.6
  TopLayer w6: v1(4721.13,7906.15) 4721.62,7906.65 R1F.2@4749.13,7906.65 ; v1(5044.13,7929.99) 5044.97,7929.15 5123.78,7929.15 IC2F.8@5124.15,7929.52
  TopLayer w10: R1F.2@4755.78,7909.83 IC1F.6@4815.1,7909.83 4816.26,7910.99 4860.13,7910.99 v1(4865.13,7905.99)
  BottomLayer w6: v1(4865.13,7905.99) 4889.13,7929.99 v1(5044.13,7929.99)
NetIC1G_5: IC1G.5 IC2G.1 J15.4C R1G.1 | length 312.1
  TopLayer w6: IC1G.5@4815.1,7791.72 4856.65,7791.72 4877.13,7812.2 4997.13,7812.2 5002.1,7807.22 IC2G.1@5002.1,7791.72
  TopLayer w10: v1(4722.13,7805.35) 4722.63,7805.86 R1G.1@4749.13,7805.86 4763.26,7791.72 IC1G.5@4815.1,7791.72
NetIC1G_6: IC1G.6 IC2G.8 J15.5C R1G.2 | length 409.6
  TopLayer w6: v1(4721.13,7768.35) 4721.62,7768.85 R1G.2@4749.13,7768.85 ; v1(5044.13,7792.2) 5044.97,7791.35 5123.78,7791.35 IC2G.8@5124.15,7791.72
  TopLayer w10: R1G.2@4755.78,7772.04 IC1G.6@4815.1,7772.04 4816.26,7773.2 4860.13,7773.2 v1(4865.13,7768.2)
  BottomLayer w6: v1(4865.13,7768.2) 4889.13,7792.2 v1(5044.13,7792.2)
NetIC1H_5: IC1H.5 IC2H.1 J15.2C R1H.1
NetIC1H_6: IC1H.6 IC2H.8 J15.1C R1H.2 | length 277.2
  TopLayer w6: v1(4721.13,8043.94) v1@4721.62,8044.44 ; v1(5044.13,8067.79) 5044.97,8066.94 5123.78,8066.94 IC2H.8@5124.15,8067.31
  TopLayer w10: v1@4860.13,8048.79 v1(4865.13,8043.79)
  BottomLayer w6: v1(4865.13,8043.79) 4889.13,8067.79 v1(5044.13,8067.79)
NetIC1I_5: IC1I.5 IC2I.1 J15.8B R1I.1 | length 312.1
  TopLayer w6: IC1I.5@4815.1,7102.75 4856.65,7102.75 4877.13,7123.22 4997.13,7123.22 5002.1,7118.24 IC2I.1@5002.1,7102.75
  TopLayer w10: v1(4722.13,7116.38) 4722.63,7116.88 R1I.1@4749.13,7116.88 4763.26,7102.75 IC1I.5@4815.1,7102.75
NetIC1I_6: IC1I.6 IC2I.8 J15.7B R1I.2 | length 409.6
  TopLayer w6: v1(4721.13,7079.38) 4721.62,7079.87 R1I.2@4749.13,7079.87 ; v1(5044.13,7103.22) 5044.97,7102.38 5123.78,7102.38 IC2I.8@5124.15,7102.75
  TopLayer w10: R1I.2@4755.78,7083.06 IC1I.6@4815.1,7083.06 4816.26,7084.22 4860.13,7084.22 v1(4865.13,7079.22)
  BottomLayer w6: v1(4865.13,7079.22) 4889.13,7103.22 v1(5044.13,7103.22)
NetIC1J_5: IC1J.5 IC2J.1 J15.6B R1J.1 | length 312.1
  TopLayer w6: IC1J.5@4815.1,7378.34 4856.65,7378.34 4877.13,7398.81 4997.13,7398.81 5002.1,7393.83 IC2J.1@5002.1,7378.34
  TopLayer w10: v1(4722.13,7391.97) 4722.63,7392.47 R1J.1@4749.13,7392.47 4763.26,7378.34 IC1J.5@4815.1,7378.34
NetIC1J_6: IC1J.6 IC2J.8 J15.3B R1J.2 | length 409.6
  TopLayer w6: v1(4721.13,7354.97) 4721.62,7355.46 R1J.2@4749.13,7355.46 ; v1(5044.13,7378.81) 5044.97,7377.97 5123.78,7377.97 IC2J.8@5124.15,7378.34
  TopLayer w10: R1J.2@4755.78,7358.65 IC1J.6@4815.1,7358.65 4816.26,7359.81 4860.13,7359.81 v1(4865.13,7354.81)
  BottomLayer w6: v1(4865.13,7354.81) 4889.13,7378.81 v1(5044.13,7378.81)
NetIC1K_5: IC1K.5 IC2K.1 J15.4B R1K.1
NetIC1K_6: IC1K.6 IC2K.8 J15.5B R1K.2 | length 37.4
  TopLayer w6: v1(5324.13,7392.81) 5324.53,7393.21 5361.4,7393.21
NetIC1L_5: IC1L.5 IC2L.1 J15.2B R1L.1 | length 312.1
  TopLayer w6: IC1L.5@4815.1,7516.13 4856.65,7516.13 4877.13,7536.61 4997.13,7536.61 5002.1,7531.63 IC2L.1@5002.1,7516.13
  TopLayer w10: v1(4722.13,7529.76) 4722.63,7530.27 R1L.1@4749.13,7530.27 4763.26,7516.13 IC1L.5@4815.1,7516.13
NetIC1L_6: IC1L.6 IC2L.8 J15.1B R1L.2 | length 409.6
  TopLayer w6: v1(4721.13,7492.76) 4721.62,7493.26 R1L.2@4749.13,7493.26 ; v1(5044.13,7516.61) 5044.97,7515.76 5123.78,7515.76 IC2L.8@5124.15,7516.13
  TopLayer w10: R1L.2@4755.78,7496.45 IC1L.6@4815.1,7496.45 4816.26,7497.61 4860.13,7497.61 v1(4865.13,7492.61)
  BottomLayer w6: v1(4865.13,7492.61) 4889.13,7516.61 v1(5044.13,7516.61)
NetIC1M_5: IC1M.5 IC2M.1 J15.8A R1M.1 | length 312.1
  TopLayer w6: IC1M.5@4815.1,6551.57 4856.65,6551.57 4877.13,6572.04 4997.13,6572.04 5002.1,6567.06 IC2M.1@5002.1,6551.57
  TopLayer w10: v1(4722.13,6565.2) 4722.63,6565.7 R1M.1@4749.13,6565.7 4763.26,6551.57 IC1M.5@4815.1,6551.57
NetIC1M_6: IC1M.6 IC2M.8 J15.7A R1M.2 | length 409.6
  TopLayer w6: v1(4721.13,6528.2) 4721.62,6528.69 R1M.2@4749.13,6528.69 ; v1(5044.13,6552.04) 5044.97,6551.2 5123.78,6551.2 IC2M.8@5124.15,6551.57
  TopLayer w10: R1M.2@4755.78,6531.88 IC1M.6@4815.1,6531.88 4816.26,6533.04 4860.13,6533.04 v1(4865.13,6528.04)
  BottomLayer w6: v1(4865.13,6528.04) 4889.13,6552.04 v1(5044.13,6552.04)
NetIC1N_5: IC1N.5 IC2N.1 J15.6A R1N.1 | length 312.1
  TopLayer w6: IC1N.5@4815.1,6827.16 4856.65,6827.16 4877.13,6847.63 4997.13,6847.63 5002.1,6842.65 IC2N.1@5002.1,6827.16
  TopLayer w10: v1(4722.13,6840.79) 4722.63,6841.29 R1N.1@4749.13,6841.29 4763.26,6827.16 IC1N.5@4815.1,6827.16
NetIC1N_6: IC1N.6 IC2N.8 J15.3A R1N.2 | length 409.6
  TopLayer w6: v1(4721.13,6803.79) 4721.62,6804.28 R1N.2@4749.13,6804.28 ; v1(5044.13,6827.63) 5044.97,6826.79 5123.78,6826.79 IC2N.8@5124.15,6827.16
  TopLayer w10: R1N.2@4755.78,6807.47 IC1N.6@4815.1,6807.47 4816.26,6808.63 4860.13,6808.63 v1(4865.13,6803.63)
  BottomLayer w6: v1(4865.13,6803.63) 4889.13,6827.63 v1(5044.13,6827.63)
NetIC1O_5: IC1O.5 IC2O.1 J15.4A R1O.1 | length 312.1
  TopLayer w6: IC1O.5@4815.1,6689.36 4856.65,6689.36 4877.13,6709.83 4997.13,6709.83 5002.1,6704.86 IC2O.1@5002.1,6689.36
  TopLayer w10: v1(4722.13,6702.99) 4722.63,6703.5 R1O.1@4749.13,6703.5 4763.26,6689.36 IC1O.5@4815.1,6689.36
NetIC1O_6: IC1O.6 IC2O.8 J15.5A R1O.2 | length 409.6
  TopLayer w6: v1(4721.13,6665.99) 4721.62,6666.49 R1O.2@4749.13,6666.49 ; v1(5044.13,6689.83) 5044.97,6688.99 5123.78,6688.99 IC2O.8@5124.15,6689.36
  TopLayer w10: R1O.2@4755.78,6669.68 IC1O.6@4815.1,6669.68 4816.26,6670.83 4860.13,6670.83 v1(4865.13,6665.83)
  BottomLayer w6: v1(4865.13,6665.83) 4889.13,6689.83 v1(5044.13,6689.83)
NetIC1P_5: IC1P.5 IC2P.1 J15.2A R1P.1 | length 312.1
  TopLayer w6: IC1P.5@4815.1,6964.95 4856.65,6964.95 4877.13,6985.43 4997.13,6985.43 5002.1,6980.45 IC2P.1@5002.1,6964.95
  TopLayer w10: v1(4722.13,6978.58) 4722.63,6979.09 R1P.1@4749.13,6979.09 4763.26,6964.95 IC1P.5@4815.1,6964.95
NetIC1P_6: IC1P.6 IC2P.8 J15.1A R1P.2 | length 409.6
  TopLayer w6: v1(4721.13,6941.58) 4721.62,6942.08 R1P.2@4749.13,6942.08 ; v1(5044.13,6965.43) 5044.97,6964.58 5123.78,6964.58 IC2P.8@5124.15,6964.95
  TopLayer w10: R1P.2@4755.78,6945.27 IC1P.6@4815.1,6945.27 4816.26,6946.43 4860.13,6946.43 v1(4865.13,6941.43)
  BottomLayer w6: v1(4865.13,6941.43) 4889.13,6965.43 v1(5044.13,6965.43)
NetIC2A_3: IC2A.3 R3A.1 T1A.3 | length 499.7
  TopLayer w6: IC2A.3@5002.1,8165.74 5035.28,8165.74 v1(5037.13,8167.58) ; v1(5078.13,8223.58) 5090.13,8235.58 5252.13,8235.58 5270.85,8216.86 5270.85,8182.58 5397.78,8182.58 R3A.1@5412.87,8167.49
  BottomLayer w6: v1(5037.13,8167.58) 5044.13,8174.58 5049.13,8174.58 5049.13,8183.94 5062.97,8197.78 5062.97,8208.43 v1(5078.13,8223.58)
NetIC2B_3: IC2B.3 R3B.1 T1B.3 | length 642.2
  TopLayer w6: 4877.13,7674.4 4997.13,7674.4 5002.1,7669.43 5002.1,7653.93 ; IC2B.3@5002.1,8441.33 5035.28,8441.33 v1(5037.13,8443.17) ; v1(5078.13,8499.17) 5090.13,8511.17 5252.13,8511.17 5270.85,8492.45 5270.85,8458.17 5397.78,8458.17 R3B.1@5412.87,8443.08
  BottomLayer w6: v1(5037.13,8443.17) 5044.13,8450.17 5049.13,8450.17 5049.13,8459.53 5062.97,8473.37 5062.97,8484.02 v1(5078.13,8499.17)
NetIC2C_3: IC2C.3 R3C.1 T1C.3 | length 499.7
  TopLayer w6: IC2C.3@5002.1,8303.54 5035.28,8303.54 v1(5037.13,8305.38) ; v1(5078.13,8361.38) 5090.13,8373.38 5252.13,8373.38 5270.85,8354.65 5270.85,8320.38 5397.78,8320.38 R3C.1@5412.87,8305.28
  BottomLayer w6: v1(5037.13,8305.38) 5044.13,8312.38 5049.13,8312.38 5049.13,8321.73 5062.97,8335.57 5062.97,8346.22 v1(5078.13,8361.38)
NetIC2D_3: IC2D.3 R3D.1 T1D.3 | length 478.4
  TopLayer w6: IC2D.3@5002.1,8579.13 5035.28,8579.13 v1(5037.13,8580.97) ; v1(5078.13,8636.97) 5090.13,8648.97 5252.13,8648.97 5270.85,8630.24 5270.85,8595.97 5397.78,8595.97
  BottomLayer w6: v1(5037.13,8580.97) 5044.13,8587.97 5049.13,8587.97 5049.13,8597.32 5062.97,8611.16 5062.97,8621.81 v1(5078.13,8636.97)
NetIC2E_3: IC2E.3 R3E.1 T1E.3 | length 90.3
  TopLayer w6: IC2E.3@5002.1,7614.56 5035.28,7614.56 v1(5037.13,7616.4)
  BottomLayer w6: v1(5037.13,7616.4) 5044.13,7623.4 5049.13,7623.4 5049.13,7632.75 5062.97,7646.6 5062.97,7657.24
NetIC2F_3: IC2F.3 R3F.1 T1F.3 | length 499.7
  TopLayer w6: IC2F.3@5002.1,7890.15 5035.28,7890.15 v1(5037.13,7891.99) ; v1(5078.13,7947.99) 5090.13,7959.99 5252.13,7959.99 5270.85,7941.27 5270.85,7906.99 5397.78,7906.99 R3F.1@5412.87,7891.9
  BottomLayer w6: v1(5037.13,7891.99) 5044.13,7898.99 5049.13,7898.99 5049.13,7908.34 5062.97,7922.19 5062.97,7932.83 v1(5078.13,7947.99)
NetIC2G_3: IC2G.3 R3G.1 T1G.3 | length 499.7
  TopLayer w6: IC2G.3@5002.1,7752.35 5035.28,7752.35 v1(5037.13,7754.2) ; v1(5078.13,7810.2) 5090.13,7822.2 5252.13,7822.2 5270.85,7803.47 5270.85,7769.2 5397.78,7769.2 R3G.1@5412.87,7754.1
  BottomLayer w6: v1(5037.13,7754.2) 5044.13,7761.2 5049.13,7761.2 5049.13,7770.55 5062.97,7784.39 5062.97,7795.04 v1(5078.13,7810.2)
NetIC2H_3: IC2H.3 R3H.1 T1H.3 | length 499.7
  TopLayer w6: IC2H.3@5002.1,8027.94 5035.28,8027.94 v1(5037.13,8029.79) ; v1(5078.13,8085.79) 5090.13,8097.79 5252.13,8097.79 5270.85,8079.06 5270.85,8044.79 5397.78,8044.79 R3H.1@5412.87,8029.69
  BottomLayer w6: v1(5037.13,8029.79) 5044.13,8036.79 5049.13,8036.79 5049.13,8046.14 5062.97,8059.98 5062.97,8070.63 v1(5078.13,8085.79)
NetIC2I_3: IC2I.3 R3I.1 T1I.3 | length 499.7
  TopLayer w6: IC2I.3@5002.1,7063.38 5035.28,7063.38 v1(5037.13,7065.22) ; v1(5078.13,7121.22) 5090.13,7133.22 5252.13,7133.22 5270.85,7114.5 5270.85,7080.22 5397.78,7080.22 R3I.1@5412.87,7065.13
  BottomLayer w6: v1(5037.13,7065.22) 5044.13,7072.22 5049.13,7072.22 5049.13,7081.57 5062.97,7095.42 5062.97,7106.06 v1(5078.13,7121.22)
NetIC2J_3: IC2J.3 R3J.1 T1J.3 | length 811.8
  TopLayer w6: 4815.1,7240.54 4856.65,7240.54 4877.13,7261.02 4997.13,7261.02 5002.1,7256.04 5002.1,7240.54 ; IC2J.3@5002.1,7338.97 5035.28,7338.97 v1(5037.13,7340.81) ; v1(5078.13,7396.81) 5090.13,7408.81 5252.13,7408.81 5270.85,7390.09 5270.85,7355.81 5397.78,7355.81 R3J.1@5412.87,7340.72
  TopLayer w10: v1(5332.12,7345.69) 5332.62,7346.2 5359.12,7346.2 5373.25,7332.06 R3J.1@5425.09,7332.06
  BottomLayer w6: v1(5037.13,7340.81) 5044.13,7347.81 5049.13,7347.81 5049.13,7357.16 5062.97,7371.01 5062.97,7381.65 v1(5078.13,7396.81)
NetIC2K_3: IC2K.3 R3K.1 T1K.3 | length 499.7
  TopLayer w6: IC2K.3@5002.1,7201.17 5035.28,7201.17 v1(5037.13,7203.02) ; v1(5078.13,7259.02) 5090.13,7271.02 5252.13,7271.02 5270.85,7252.29 5270.85,7218.02 5397.78,7218.02 R3K.1@5412.87,7202.92
  BottomLayer w6: v1(5037.13,7203.02) 5044.13,7210.02 5049.13,7210.02 5049.13,7219.37 5062.97,7233.21 5062.97,7243.86 v1(5078.13,7259.02)
NetIC2L_3: IC2L.3 R3L.1 T1L.3 | length 499.7
  TopLayer w6: IC2L.3@5002.1,7476.76 5035.28,7476.76 v1(5037.13,7478.61) ; v1(5078.13,7534.61) 5090.13,7546.61 5252.13,7546.61 5270.85,7527.88 5270.85,7493.61 5397.78,7493.61 R3L.1@5412.87,7478.51
  BottomLayer w6: v1(5037.13,7478.61) 5044.13,7485.61 5049.13,7485.61 5049.13,7494.96 5062.97,7508.8 5062.97,7519.45 v1(5078.13,7534.61)
NetIC2M_3: IC2M.3 R3M.1 T1M.3 | length 499.7
  TopLayer w6: IC2M.3@5002.1,6512.2 5035.28,6512.2 v1(5037.13,6514.04) ; v1(5078.13,6570.04) 5090.13,6582.04 5252.13,6582.04 5270.85,6563.31 5270.85,6529.04 5397.78,6529.04 R3M.1@5412.87,6513.94
  BottomLayer w6: v1(5037.13,6514.04) 5044.13,6521.04 5049.13,6521.04 5049.13,6530.39 5062.97,6544.23 5062.97,6554.88 v1(5078.13,6570.04)
NetIC2N_3: IC2N.3 R3N.1 T1N.3 | length 499.7
  TopLayer w6: IC2N.3@5002.1,6787.79 5035.28,6787.79 v1(5037.13,6789.63) ; v1(5078.13,6845.63) 5090.13,6857.63 5252.13,6857.63 5270.85,6838.91 5270.85,6804.63 5397.78,6804.63 R3N.1@5412.87,6789.54
  BottomLayer w6: v1(5037.13,6789.63) 5044.13,6796.63 5049.13,6796.63 5049.13,6805.98 5062.97,6819.83 5062.97,6830.47 v1(5078.13,6845.63)
NetIC2O_3: IC2O.3 R3O.1 T1O.3 | length 499.7
  TopLayer w6: IC2O.3@5002.1,6649.99 5035.28,6649.99 v1(5037.13,6651.83) ; v1(5078.13,6707.83) 5090.13,6719.83 5252.13,6719.83 5270.85,6701.11 5270.85,6666.83 5397.78,6666.83 R3O.1@5412.87,6651.74
  BottomLayer w6: v1(5037.13,6651.83) 5044.13,6658.83 5049.13,6658.83 5049.13,6668.19 5062.97,6682.03 5062.97,6692.68 v1(5078.13,6707.83)
NetIC2P_3: IC2P.3 R3P.1 T1P.3 | length 499.7
  TopLayer w6: IC2P.3@5002.1,6925.58 5035.28,6925.58 v1(5037.13,6927.43) ; v1(5078.13,6983.43) 5090.13,6995.43 5252.13,6995.43 5270.85,6976.7 5270.85,6942.43 5397.78,6942.43 R3P.1@5412.87,6927.33
  BottomLayer w6: v1(5037.13,6927.43) 5044.13,6934.43 5049.13,6934.43 5049.13,6943.78 5062.97,6957.62 5062.97,6968.27 v1(5078.13,6983.43)
NetIC27_5: IC27.5 R121.1 R122.2
NetIC27_9: IC27.9 L2.1
NetLD1_1: LD1.1 R89.1
NetLD1_3: LD1.3 R91.1
NetLD1_5: LD1.5 R93.1
NetLD1_7: LD1.7 R95.1
NetLD2_1: LD2.1 R97.1
NetLD2_3: LD2.3 R99.1
NetLD2_5: LD2.5 R101.1
NetLD2_7: LD2.7 R103.1
NetLD3_1: LD3.1 R105.1
NetLD3_3: LD3.3 R107.1
NetLD3_5: LD3.5 R109.1
NetLD3_7: LD3.7 R111.1
NetLD4_1: LD4.1 R113.1
NetLD4_3: LD4.3 R115.1
NetLD4_5: LD4.5 R117.1
NetLD4_7: LD4.7 R119.1
P3V3: C1A.2 C1B.2 C1C.2 C1D.2 C1E.2 C1F.2 C1G.2 C1H.2 C1I.2 C1J.2 C1K.2 C1L.2 C1M.2 C1N.2 C1O.2 C1P.2 C2A.2 C2B.2 C2C.2 C2D.2 C2E.2 C2F.2 C2G.2 C2H.2 C2I.2 C2J.2 C2K.2 C2L.2 C2M.2 C2N.2 C2O.2 C2P.2 C59.2 C60.2 C61.2 C62.1 C65.2 C66.2 IC1A.7 IC1B.7 IC1C.7 IC1D.7 IC1E.7 IC1F.7 IC1G.7 IC1H.7 IC1I.7 IC1J.7 IC1K.7 IC1L.7 IC1M.7 IC1N.7 IC1O.7 IC1P.7 IC2A.7 IC2B.7 IC2C.7 IC2D.7 IC2E.7 IC2F.7 IC2G.7 IC2H.7 IC2I.7 IC2J.7 IC2K.7 IC2L.7 IC2M.7 IC2N.7 IC2O.7 IC2P.7 IC27.8 IC27.10 L2.2 LD1.2 LD1.4 LD1.6 LD1.8 LD2.2 LD2.4 LD2.6 LD2.8 LD3.2 LD3.4 LD3.6 LD3.8 LD4.2 LD4.4 LD4.6 LD4.8 R3A.2 R3B.2 R3C.2 R3D.2 R3E.2 R3F.2 R3G.2 R3H.2 R3I.2 R3J.2 R3K.2 R3L.2 R3M.2 R3N.2 R3O.2 R3P.2 R90.2 R92.2 R94.2 R96.2 R98.2 R100.2 R102.2 R104.2 R106.2 R108.2 R110.2 R112.2 R114.2 R116.2 R118.2 R120.2 R121.2 | length 3315.8
  TopLayer w10: C2M.2@4764.84,6489.2 4787.84,6512.2 IC1M.7@4815.1,6512.2 v1(4844.28,6512.2) ; C2O.2@4764.84,6626.99 4787.84,6649.99 IC1O.7@4815.1,6649.99 v1(4844.28,6649.99) ; C2N.2@4764.84,6764.79 4787.84,6787.79 IC1N.7@4815.1,6787.79 v1(4844.28,6787.79) ; C2P.2@4764.84,6902.58 4787.84,6925.58 IC1P.7@4815.1,6925.58 v1(4844.28,6925.58) ; C2I.2@4764.84,7040.38 4787.84,7063.38 IC1I.7@4815.1,7063.38 v1(4844.28,7063.38) ; C2K.2@4764.84,7178.17 4787.84,7201.17 ; C2J.2@4764.84,7315.97 4787.84,7338.97 IC1J.7@4815.1,7338.97 v1(4844.28,7338.97) ; C2L.2@4764.84,7453.76 4787.84,7476.76 IC1L.7@4815.1,7476.76 v1(4844.28,7476.76) ; C2E.2@4764.84,7591.56 4787.84,7614.56 IC1E.7@4815.1,7614.56 v1(4844.28,7614.56) ; C2G.2@4764.84,7729.35 4787.84,7752.35 IC1G.7@4815.1,7752.35 v1(4844.28,7752.35) ; C2F.2@4764.84,7867.15 4787.84,7890.15 IC1F.7@4815.1,7890.15 v1(4844.28,7890.15) ; C2H.2@4764.84,8004.94 4787.84,8027.94 IC1H.7@4815.1,8027.94 v1(4844.28,8027.94) ; C2C.2@4764.84,8280.54 4787.84,8303.54 IC1C.7@4815.1,8303.54 v1(4844.28,8303.54) ; C2B.2@4764.84,8418.33 4787.84,8441.33 IC1B.7@4815.1,8441.33 v1(4844.28,8441.33) ; C2D.2@4764.84,8556.13 4787.84,8579.13 IC1D.7@4815.1,8579.13 v1(4844.28,8579.13) ; v1(5090.97,6531.88) IC2M.7@5124.15,6531.88 5152.92,6531.88 5152.92,6541.96 5165.33,6541.96 C1M.2@5178.41,6555.04 ; v1(5090.97,6669.68) IC2O.7@5124.15,6669.68 5152.92,6669.68 5152.92,6679.76 5165.33,6679.76 C1O.2@5178.41,6692.83 ; v1(5090.97,6807.47) IC2N.7@5124.15,6807.47 5152.92,6807.47 5152.92,6817.55 5165.33,6817.55 C1N.2@5178.41,6830.63 ; v1(5090.97,6945.27) IC2P.7@5124.15,6945.27 5152.92,6945.27 5152.92,6955.35 5165.33,6955.35 C1P.2@5178.41,6968.43 ; v1(5090.97,7083.06) IC2I.7@5124.15,7083.06 5152.92,7083.06 5152.92,7093.14 5165.33,7093.14 C1I.2@5178.41,7106.22 ; v1(5090.97,7220.86) IC2K.7@5124.15,7220.86 5152.92,7220.86 5152.92,7230.94 5165.33,7230.94 C1K.2@5178.41,7244.02 ; v1(5090.97,7358.65) IC2J.7@5124.15,7358.65 5152.92,7358.65 5152.92,7368.73 5165.33,7368.73 C1J.2@5178.41,7381.81 ; v1(5090.97,7496.45) IC2L.7@5124.15,7496.45 5152.92,7496.45 5152.92,7506.53 5165.33,7506.53 C1L.2@5178.41,7519.61 ; v1(5090.97,7634.24) IC2E.7@5124.15,7634.24 5152.92,7634.24 5152.92,7644.32 5165.33,7644.32 C1E.2@5178.41,7657.4 ; v1(5090.97,7772.04) IC2G.7@5124.15,7772.04 5152.92,7772.04 5152.92,7782.12 5165.33,7782.12 C1G.2@5178.41,7795.2 ; v1(5090.97,7909.83) IC2F.7@5124.15,7909.83 5152.92,7909.83 5152.92,7919.91 5165.33,7919.91 C1F.2@5178.41,7932.99 ; v1(5090.97,8047.63) IC2H.7@5124.15,8047.63 5152.92,8047.63 5152.92,8057.71 5165.33,8057.71 C1H.2@5178.41,8070.79 ; v1(5090.97,8185.43) IC2A.7@5124.15,8185.43 5152.92,8185.43 5152.92,8195.5 5165.33,8195.5 C1A.2@5178.41,8208.58 ; v1(5090.97,8323.22) IC2C.7@5124.15,8323.22 5152.92,8323.22 5152.92,8333.3 5165.33,8333.3 C1C.2@5178.41,8346.38 ; v1(5090.97,8461.02) IC2B.7@5124.15,8461.02 5152.92,8461.02 5152.92,8471.09 5165.33,8471.09 C1B.2@5178.41,8484.17 ; v1(5090.97,8598.81) IC2D.7@5124.15,8598.81 5152.92,8598.81 5152.92,8608.89 5165.33,8608.89 C1D.2@5178.41,8621.97 ; v1(5417.13,6573.2) 5418.13,6572.2 R3M.2@5418.13,6545.7 ; v1(5417.13,6710.99) 5418.13,6709.99 R3O.2@5418.13,6683.5 ; v1(5417.13,6848.79) 5418.13,6847.79 R3N.2@5418.13,6821.29 ; v1(5417.13,6986.58) 5418.13,6985.58 R3P.2@5418.13,6959.09 ; v1(5417.13,7124.38) 5418.13,7123.38 R3I.2@5418.13,7096.88 ; v1(5417.13,7262.17) 5418.13,7261.17 R3K.2@5418.13,7234.68 ; v1(5417.13,7537.76) 5418.13,7536.76 R3L.2@5418.13,7510.27 ; v1(5417.13,7813.35) 5418.13,7812.35 R3G.2@5418.13,7785.86 ; v1(5417.13,7951.15) 5418.13,7950.15 R3F.2@5418.13,7923.65 ; v1(5417.13,8088.94) 5418.13,8087.94 R3H.2@5418.13,8061.45 ; v1(5417.13,8226.74) 5418.13,8225.74 R3A.2@5418.13,8199.24 ; v1(5417.13,8364.54) 5418.13,8363.54 R3C.2@5418.13,8337.04 ; v1(5417.13,8502.33) 5418.13,8501.33 R3B.2@5418.13,8474.83 ; v1(5417.13,8640.13) 5418.13,8639.13 R3D.2@5418.13,8612.63
P3V3_MP: IC23.2 IC23.3 IC25.2 IC25.3
P3V3_MP1: C57.2 C58.2 IC23.16 IC24.4 J14.30
P3V3_MP2: C63.2 C64.2 IC25.16 IC26.4 J24.30
P12V0: C67.2 C68.2 IC27.2 IC27.3 J14.28 J14.29 J24.28 J24.29
pads on no net: IC2A.2 IC2B.2 IC2C.2 IC2D.2 IC2E.2 IC2F.2 IC2G.2 IC2H.2 IC2I.2 IC2J.2 IC2K.2 IC2L.2 IC2M.2 IC2N.2 IC2O.2 IC2P.2 IC23.13 IC24.5 IC25.13 IC26.5 IC27.4 IC27.7 J15.M1 J15.M2

## Polygon pours and split planes (outlines as drawn)
no net on Internal Plane 1 (split plane): 6475.97,6020.1 4020.1,6020.1 4020.1,9916.9 6475.97,9916.9

## Keep-outs
KeepOutLayer:
  lines w8: 4065,6319 4240,6319 4240,6119 6456.69,6119 6456.69,9819 4240,9819 4240,9619 4065,9619 4065,6319

## Silkscreen, mask and mechanical layers (free items; w line width, h text height)
TopOverlay:
  circle w10: c4140,6217 r112.5
  circle w10: c4140,9717 r112.5
Mechanical1:
  the board outline again, w20

## Dimensions
4140,5980 to 4000,6000 on Mechanical4
3980,6217 to 4000,6000 on Mechanical4

## Text inside footprints (layer, text, board x,y; h text height)
J14: TopOverlay "30" at 5892.4,6647.84 h40 r270; Mechanical14 "30" at 5892.4,6647.84 h40 r270
J24: TopOverlay "30" at 6345.16,6657.68 h40 r270; Mechanical14 "30" at 6345.16,6657.68 h40 r270
LD1: TopOverlay "D" at 4469.65,9288.15 h39.37 r90; TopOverlay "C" at 4369.65,9288.15 h39.37 r90; TopOverlay "B" at 4269.65,9288.15 h39.37 r90; TopOverlay "A" at 4169.65,9288.15 h39.37 r90; TopOverlay "A" at 4550.39,9336.18 h39.37; TopOverlay "C" at 4550.39,9236.18 h39.37; Mechanical14 "D" at 4469.65,9288.15 h39.37 r90; Mechanical14 "C" at 4369.65,9288.15 h39.37 r90; Mechanical14 "B" at 4269.65,9288.15 h39.37 r90; Mechanical14 "A" at 4169.65,9288.15 h39.37 r90; Mechanical14 "C" at 4550.39,9236.18 h39.37; Mechanical14 "A" at 4550.39,9336.18 h39.37
LD2: TopOverlay "D" at 4469.65,9494.84 h39.37 r90; TopOverlay "C" at 4369.65,9494.84 h39.37 r90; TopOverlay "B" at 4269.65,9494.84 h39.37 r90; TopOverlay "A" at 4169.65,9494.84 h39.37 r90; TopOverlay "A" at 4550.39,9542.87 h39.37; TopOverlay "C" at 4550.39,9442.87 h39.37; Mechanical14 "D" at 4469.65,9494.84 h39.37 r90; Mechanical14 "C" at 4369.65,9494.84 h39.37 r90; Mechanical14 "B" at 4269.65,9494.84 h39.37 r90; Mechanical14 "A" at 4169.65,9494.84 h39.37 r90; Mechanical14 "C" at 4550.39,9442.87 h39.37; Mechanical14 "A" at 4550.39,9542.87 h39.37
LD3: TopOverlay "D" at 4469.65,8874.76 h39.37 r90; TopOverlay "C" at 4369.65,8874.76 h39.37 r90; TopOverlay "B" at 4269.65,8874.76 h39.37 r90; TopOverlay "A" at 4169.65,8874.76 h39.37 r90; TopOverlay "A" at 4550.39,8922.8 h39.37; TopOverlay "C" at 4550.39,8822.8 h39.37; Mechanical14 "D" at 4469.65,8874.76 h39.37 r90; Mechanical14 "C" at 4369.65,8874.76 h39.37 r90; Mechanical14 "B" at 4269.65,8874.76 h39.37 r90; Mechanical14 "A" at 4169.65,8874.76 h39.37 r90; Mechanical14 "C" at 4550.39,8822.8 h39.37; Mechanical14 "A" at 4550.39,8922.8 h39.37
LD4: TopOverlay "D" at 4469.65,9081.46 h39.37 r90; TopOverlay "C" at 4369.65,9081.46 h39.37 r90; TopOverlay "B" at 4269.65,9081.46 h39.37 r90; TopOverlay "A" at 4169.65,9081.46 h39.37 r90; TopOverlay "A" at 4550.39,9129.49 h39.37; TopOverlay "C" at 4550.39,9029.49 h39.37; Mechanical14 "D" at 4469.65,9081.46 h39.37 r90; Mechanical14 "C" at 4369.65,9081.46 h39.37 r90; Mechanical14 "B" at 4269.65,9081.46 h39.37 r90; Mechanical14 "A" at 4169.65,9081.46 h39.37 r90; Mechanical14 "C" at 4550.39,9029.49 h39.37; Mechanical14 "A" at 4550.39,9129.49 h39.37
SW5: TopOverlay "8" at 5621.5,9623.66 h39.37 r90; TopOverlay "7" at 5621.5,9573.66 h39.37 r90; TopOverlay "6" at 5621.5,9523.66 h39.37 r90; TopOverlay "5" at 5621.5,9473.66 h39.37 r90; TopOverlay "4" at 5621.5,9423.66 h39.37 r90; TopOverlay "3" at 5621.5,9373.66 h39.37 r90; TopOverlay "ON" at 5481.5,9258.66 h39.37 r90; TopOverlay "2" at 5621.5,9323.66 h39.37 r90; TopOverlay "1" at 5621.5,9273.66 h39.37 r90; Mechanical14 "8" at 5621.1,9623.66 h39.37 r90; Mechanical14 "7" at 5621.1,9573.66 h39.37 r90; Mechanical14 "6" at 5621.1,9523.66 h39.37 r90; Mechanical14 "5" at 5621.1,9473.66 h39.37 r90; Mechanical14 "4" at 5621.1,9423.66 h39.37 r90; Mechanical14 "3" at 5621.1,9373.66 h39.37 r90; Mechanical14 "ON" at 5481.1,9258.66 h39.37 r90; Mechanical14 "2" at 5621.1,9323.66 h39.37 r90; Mechanical14 "1" at 5621.1,9273.66 h39.37 r90
SW6: TopOverlay "8" at 5621.5,9131.54 h39.37 r90; TopOverlay "7" at 5621.5,9081.54 h39.37 r90; TopOverlay "6" at 5621.5,9031.54 h39.37 r90; TopOverlay "5" at 5621.5,8981.54 h39.37 r90; TopOverlay "4" at 5621.5,8931.54 h39.37 r90; TopOverlay "3" at 5621.5,8881.54 h39.37 r90; TopOverlay "ON" at 5481.5,8766.54 h39.37 r90; TopOverlay "2" at 5621.5,8831.54 h39.37 r90; TopOverlay "1" at 5621.5,8781.54 h39.37 r90; Mechanical14 "8" at 5621.1,9131.54 h39.37 r90; Mechanical14 "7" at 5621.1,9081.54 h39.37 r90; Mechanical14 "6" at 5621.1,9031.54 h39.37 r90; Mechanical14 "5" at 5621.1,8981.54 h39.37 r90; Mechanical14 "4" at 5621.1,8931.54 h39.37 r90; Mechanical14 "3" at 5621.1,8881.54 h39.37 r90; Mechanical14 "ON" at 5481.1,8766.54 h39.37 r90; Mechanical14 "2" at 5621.1,8831.54 h39.37 r90; Mechanical14 "1" at 5621.1,8781.54 h39.37 r90